# EAGLE board rotary-encoder (EAGLE 4.16)
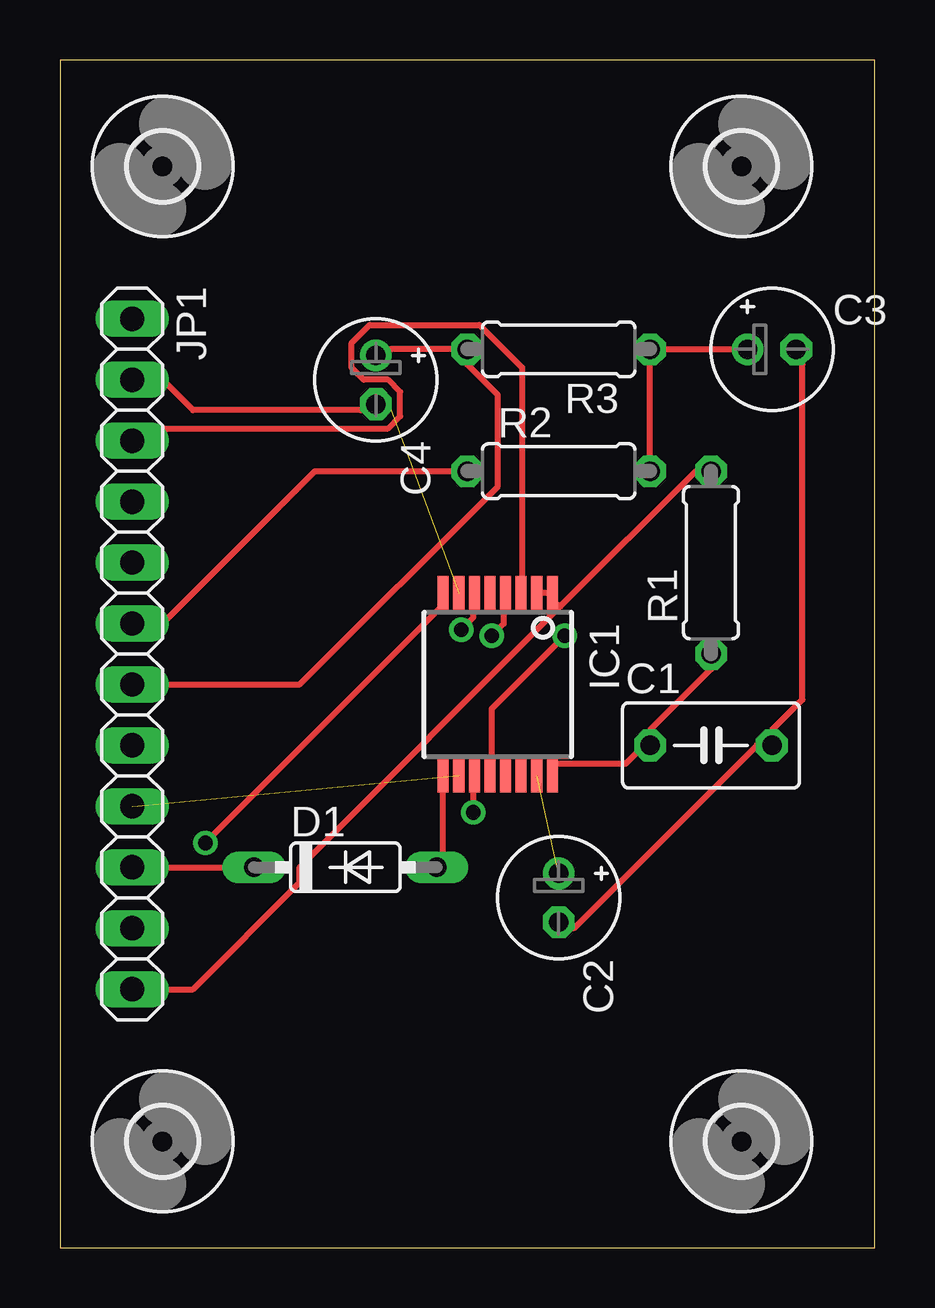
[diagram p0: board, top side]
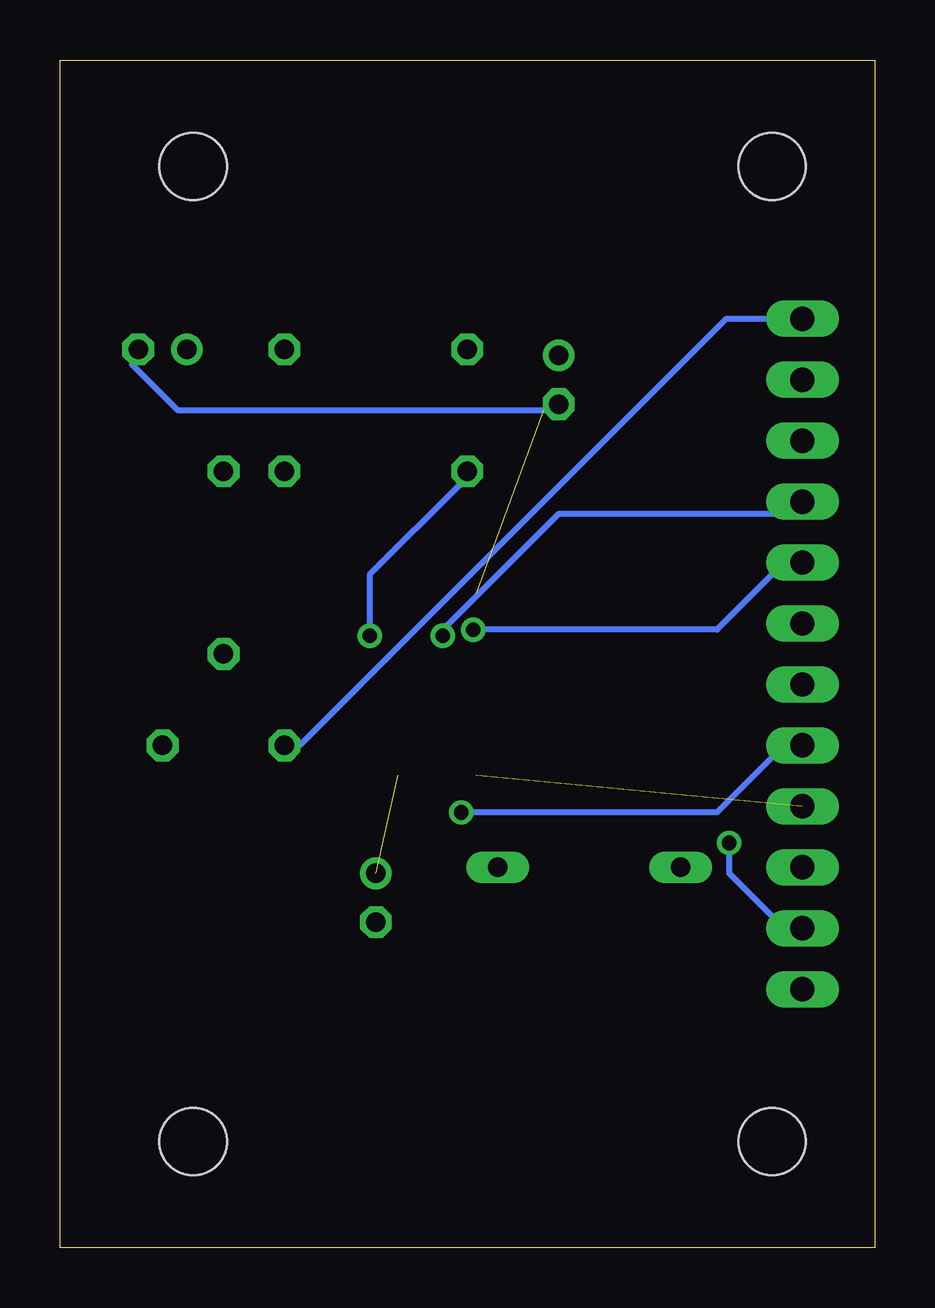
[diagram p1: board, bottom side, seen from below]

Size 33.96 x 49.52 mm. Coordinates in mm from the lower left corner, seen from the top.
Outline: 0,0 33.96,0 33.96,49.52 0,49.52 0,0
Copper layers (1*16): Top 0.035mm / dielectric 1.5mm / Bottom 0.035mm
Design rules "default": minimum track width 10mil, minimum drill 24mil, track to track 8mil, track to pad 8mil, pad to pad 8mil, via to via 8mil, smd to smd 8mil, copper to edge 40mil, drill to drill 8mil, minimum pad ring 10mil, minimum via ring 8mil, stop-mask expansion 4mil, vias tented up to drill 0mil, thermal gap 10mil

## Footprints (pad centres in the part's own frame; a part is rotated, then mirrored left to right if it is on the bottom)
C050-035X075 = drill 0.813 octagon: 1 -2.54,0; 2 2.54,0
E2-5 = drill 0.813 pad 1.27 round: + -1.016,0 | drill 0.813 pad 1.27 octagon: - 1.016,0
DO35-7 = drill 0.813 long: A 3.81,0; C -3.81,0
2,8 = hole 2.8: 0,0
SSOP16 = smd 0.46 x 1.43: 1 -2.275,-3.795; 2 -1.625,-3.795; 3 -0.975,-3.795; 4 -0.325,-3.795; 5 0.325,-3.795; 6 0.975,-3.795; 7 1.625,-3.795; 8 2.275,-3.795; 9 2.275,3.795; 10 1.625,3.795; 11 0.975,3.795; 12 0.325,3.795; 13 -0.325,3.795; 14 -0.975,3.795; 15 -1.625,3.795; 16 -2.275,3.795
1X12 = drill 1.016 long: 1 -13.97,0; 2 -11.43,0; 3 -8.89,0; 4 -6.35,0; 5 -3.81,0; 6 -1.27,0; 7 1.27,0; 8 3.81,0; 9 6.35,0; 10 8.89,0; 11 11.43,0; 12 13.97,0
0207/7 = drill 0.813 octagon: 1 -3.81,0; 2 3.81,0

## Placement (x,y rotation side)
C1  100nF  [C050-035X075]  27.14,20.95 0 top
C2  10uF  [E2-5]  20.79,14.6 270 top
C3  1uF  [E2-5]  29.68,37.46 0 top
C4  1uF  [E2-5]  13.17,36.19 270 top
D1  1N5817  [DO35-7]  11.9,15.87 0 top
H1  MOUNT-HOLE2.8  [2,8]  4.28,45.08 0 top
H2  MOUNT-HOLE2.8  [2,8]  4.28,4.44 0 top
H3  MOUNT-HOLE2.8  [2,8]  28.41,4.44 0 top
H4  MOUNT-HOLE2.8  [2,8]  28.41,45.08 0 top
IC1  AS5040  [SSOP16]  18.25,23.49 180 top
JP1  [1X12]  3.01,24.76 270 top
R1  4.7K  [0207/7]  27.14,28.57 90 top
R2  4.7K  [0207/7]  20.79,32.38 0 top
R3  4.7K  [0207/7]  20.79,37.46 180 top

## Library data of the parts
C1-C4 R1-R3 = rcl
D1 = diode
H1-H4 = holes
IC1 = austriamicrosystems
JP1 = pinhead

## Nets
ANALOG: C4.+ JP1.7 R3.2
CALIBRATE: IC1.1 IC1.2 JP1.12 R1.2
DATA_OUT: D1.C JP1.10
DATA_OUT_PRE: D1.A IC1.9
GND: C1.2 C2.- C3.- C4.- IC1.7 JP1.2
N$1: IC1.11 JP1.8
N$2: C3.+ R2.2 R3.1
N$3: IC1.3 JP1.3
N$4: IC1.4 JP1.4
N$5: IC1.6 JP1.5
N$6: IC1.10 JP1.9
N$8: C2.+ IC1.15
N$9: IC1.8 JP1.11
PWM: IC1.12 JP1.6 R2.1
VCC: C1.1 IC1.16 JP1.1 R1.1

## Tracks (layer width: path | path; a pad name or v marks a point on that pad's centre or on a via)
ANALOG
  Top 0.254: C4.+ 13.81,37.46 R3.2 16.98,36.83 18.25,35.56 18.25,31.75 10,23.49 JP1.7
CALIBRATE
  Top 0.254: 20.85,26.73 10,15.87 10,15.23 5.55,10.79 JP1.12 | 20.85,26.73 26.5,32.38 R1.2 | IC1.2 20.03,27.3 20.54,27.3 IC1.1 20.54,26.79 20.79,26.79 20.85,26.73
DATA_OUT
  Top 0.254: JP1.10 D1.C
DATA_OUT_PRE
  Top 0.254: IC1.9 15.96,19.17 15.96,16.38 D1.A
GND  (1 unrouted)
  Top 0.254: C4.- 12.54,34.92 5.55,34.92 4.28,36.19 JP1.2 | C2.- 21.42,13.33 29.04,20.95 C1.2 29.68,21.59 30.95,22.86 30.95,36.83 C3.-
  Bottom 0.254: C4.- 13.81,34.92 29.04,34.92 30.95,36.83 C3.-
N$1  (via drill 0.61)
  Top 0.254: v17.23,18.16 17.23,19.17 IC1.11
  Bottom 0.254: v17.23,18.16 6.57,18.16 4.28,20.44 JP1.8
N$2
  Top 0.254: R2.2 R3.1 C3.+
N$3
  Top 0.254: IC1.3 19.27,27.81 19.27,36.7 17.49,38.48 12.92,38.48 12.15,37.71 12.15,36.7 12.66,36.19 13.68,36.19 14.19,35.68 14.19,34.67 13.68,34.16 4.28,34.16 JP1.3
N$4  (via drill 0.61)
  Top 0.254: v18,25.52 18.5,26.03 18.5,26.79 IC1.4
  Bottom 0.254: v18,25.52 18,25.78 13.17,30.6 4.28,30.6 JP1.4
N$5  (via drill 0.61)
  Top 0.254: v16.73,25.78 17.23,26.28 17.23,26.79 IC1.6
  Bottom 0.254: v16.73,25.78 6.57,25.78 4.28,28.06 JP1.5
N$6  (1 unrouted)
N$8  (1 unrouted)
N$9  (via drill 0.61)
  Top 0.254: v6.06,16.89 15.96,26.79 IC1.8
  Bottom 0.254: v6.06,16.89 6.06,15.62 4.28,13.84 JP1.11
PWM  (via drill 0.61)
  Top 0.254: R2.1 10.63,32.38 4.28,26.03 JP1.6 | v21.04,25.52 18,22.47 18,20.19 IC1.12
  Bottom 0.254: v21.04,25.52 21.04,28.06 17.23,31.87 R2.1
VCC
  Top 0.254: R1.1 27.14,24.12 24.6,21.59 C1.1 24.09,20.7 23.58,20.19 20.54,20.19 IC1.16
  Bottom 0.254: JP1.1 6.18,38.73 23.96,20.95 C1.1